# EAGLE board power (EAGLE 6.2)
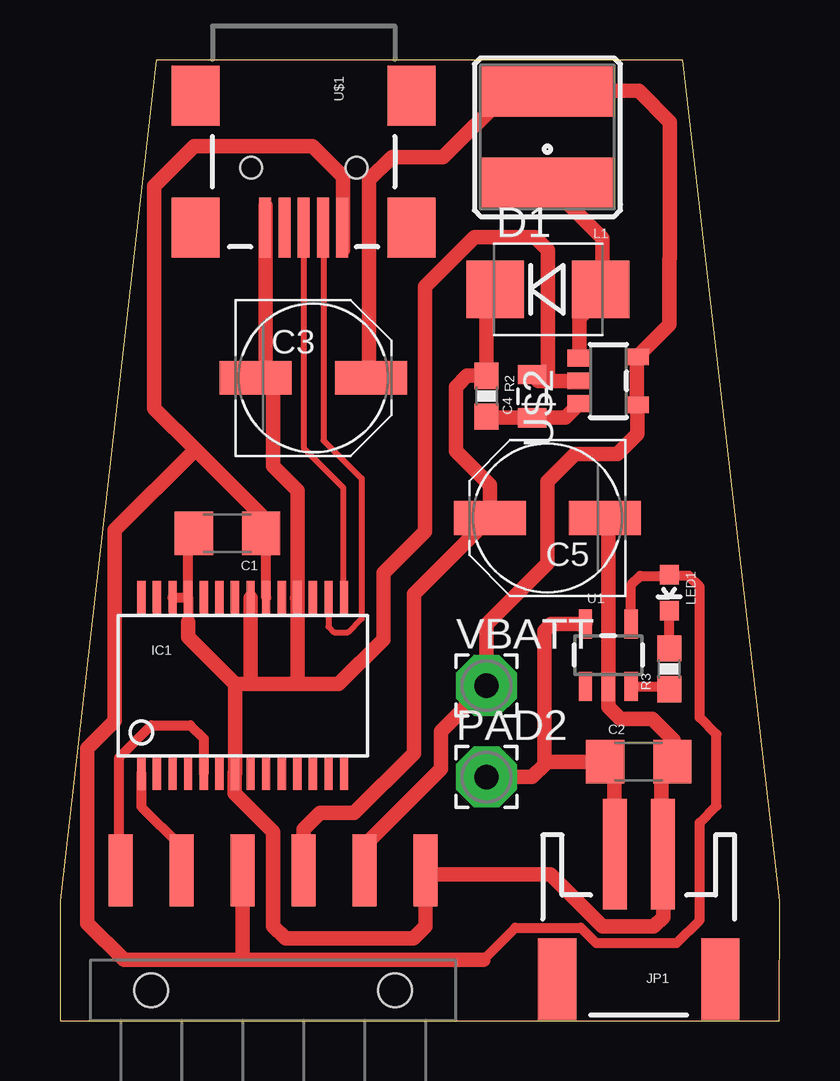
[diagram p0: board, top side]

Size 30 x 40.05 mm. Coordinates in mm from the lower left corner, seen from the top.
Outline: 0,0 29.99,0 29.99,0.09 30,5 25.96,40.05 4.01,40.05 0,5 0,0
Copper layers (1*16): Top 0.035mm / dielectric 1.5mm / Bottom 0.035mm
Design rules: minimum track width 10mil, minimum drill 24mil, track to track 8mil, track to pad 8mil, pad to pad 8mil, via to via 8mil, smd to smd 8mil, copper to edge 0mil, drill to drill 8mil, minimum pad ring 10mil, minimum via ring 8mil, stop-mask expansion 4mil, vias tented up to drill 0mil, thermal gap 10mil

## Footprints (pad centres in the part's own frame; a part is rotated, then mirrored left to right if it is on the bottom)
1206 = smd 1.6 x 1.8: 1 -1.4,0; 2 1.4,0
PANASONIC_D = smd 3 x 1.4: + 2.4,0; - -2.4,0
0805 = smd 0.8 x 1.2: 1 -0.9,0; 2 0.9,0
SMB-DIODE = smd 2.4 x 2.4: A 2.2,0; C -2.2,0
SSOP28DB = smd 0.348 x 1.397: 1 -4.225,-3.656; 2 -3.575,-3.656; 3 -2.925,-3.656; 4 -2.275,-3.656; 5 -1.625,-3.656; 6 -0.975,-3.656; 7 -0.325,-3.656; 8 0.325,-3.656; 9 0.975,-3.656; 10 1.625,-3.656; 11 2.275,-3.656; 12 2.925,-3.656; 13 3.575,-3.656; 14 4.225,-3.656; 15 4.225,3.656; 16 3.575,3.656; 17 2.925,3.656; 18 2.275,3.656; 19 1.625,3.656; 20 0.975,3.656; 21 0.325,3.656; 22 -0.325,3.656; 23 -0.975,3.656; 24 -1.625,3.656; 25 -2.275,3.656; 26 -2.925,3.656; 27 -3.575,3.656; 28 -4.225,3.656
JST-2-SMD = smd 1 x 4.6: 1 -1,-3.7; 2 1,-3.7 | smd 1.6 x 3.4: NC1 -3.4,1.5; NC2 3.4,1.5
1X06-SMD = smd 1 x 3: 1 -6.35,5; 2 -3.81,5; 3 -1.27,5; 4 1.27,5; 5 3.81,5; 6 6.35,5 | hole 1.4: -5.08,0; 5.08,0
CR54 = smd 5.5 x 2.15: P$1 0,1.92; P$2 0,-1.92
LED-0603 = smd 0.8 x 0.8: A 0,-0.75; C 0,0.75
2,54/1,0 = drill 1.016 pad 2.54 octagon: 1 0,0
0603-RES = smd 1.1 x 1: 1 -0.85,0; 2 0.85,0
SOT23-5 = smd 0.55 x 1.2: 1 -0.95,-1.3; 2 0,-1.3; 3 0.95,-1.3; 4 0.95,1.3; 5 -0.95,1.3
USB-MINIB = smd 2.5 x 0.5: D+ 2.5,0; D- 2.5,0.8; GND 2.5,-1.6; ID 2.5,-0.8; VBUS 2.5,1.6 | smd 2.5 x 2: MTN1 -3,4.5; MTN2 2.5,4.5; MTN3 -3,-4.5; MTN4 2.5,-4.5 | hole 0.9: 0,2.2; 0,-2.2
SOT23-5' = smd 0.7 x 1: 1 0.95,1.2; 2 0,1.2; 3 -0.95,1.2; 4 -1,-1.2; 5 1,-1.2

## Placement (x,y rotation side)
C1  4.7uF  [1206]  6.99,20.32 180 top
C2  4.7uF  [1206]  24.13,10.79 0 top
C3  100uF  [PANASONIC_D]  10.57,26.8 0 top
C4  1uF  [0805]  19.68,26.04 90 top
C5  100uF  [PANASONIC_D]  20.32,20.95 180 top
D1  ZHCS2000  [SMB-DIODE]  20.35,30.49 0 top
IC1  FT232RLSSOP  [SSOP28DB]  7.62,13.97 0 top
JP1  Battery  [JST-2-SMD]  24.13,3.24 180 top
JP3  [1X06-SMD]  8.89,1.27 0 top
L1  10uH  [CR54]  20.32,36.83 180 top
LED1  [LED-0603]  25.4,17.84 180 top
PAD2  [2,54/1,0]  17.78,10.16 0 top
R2  10  [0603-RES]  17.78,26.04 270 top
R3  150  [0603-RES]  25.4,14.67 90 top
U1  MAX1555  [SOT23-5]  22.86,15.24 0 top
U$1  USB-MINIB-5PIN  [USB-MINIB]  10.16,35.56 270 top
U$2  SP6641SP6641A/B  [SOT23-5']  22.86,26.67 90 top
VBATT  [2,54/1,0]  17.78,13.97 0 top

## Library data of the parts
C1 C2 C4 D1 IC1 JP1 L1 LED1 R2 R3 U1 U$1 = SparkFun
C3 C5 = rcl
JP3 = SparkFun-Connectors
PAD2 VBATT = wirepad
U$2 = Sipex Custom

## Nets
D+: IC1.15 U$1.D+
D-: IC1.16 U$1.D-
GND: C1.2 C2.2 C3.- C4.2 C5.- IC1.7 IC1.18 IC1.21 IC1.25 IC1.26 JP1.1 JP3.6 U1.2 U$1.GND U$2.2
LX: D1.A L1.P$1 U$2.1
N$2: LED1.C R3.2
N$4: R3.1 U1.3
N$55: C2.1 JP1.2 PAD2.1 U1.5
RX: IC1.5 JP3.1
TX: IC1.1 JP3.2
VBATT: C3.+ JP3.5 L1.P$2 U$2.4 U$2.5 VBATT.1
VBOOST: C5.+ D1.C JP3.4 R2.1
VBUS: C1.1 IC1.20 JP3.3 LED1.A U1.4 U$1.VBUS
VCCIO: IC1.4
VOUT: C4.1 R2.2 U$2.3

## Tracks (layer width: path | path; a pad name or v marks a point on that pad's centre or on a via)
D+
  Top 0.254: 11.87,17.66 IC1.15 11.81,17.66 11.81,22.23 10.16,23.88 U$1.D+
D-
  Top 0.254: IC1.16 11.2,16.43 11.43,16.19 12,16.19 12.57,16.76 12.57,22.61 10.99,24.19 10.99,33.03 U$1.D- 10.97,33.05
GND
  Top 0.254: 8.64,26.92 8.89,26.67 C3.- 9.14,26.67 | 24.89,5.33 24.89,6.86 JP1.1 25.15,7.11 25.4,7.37 | 15.24,6.1 JP3.6 | 8.57,33.97 8.45,32.79 U$1.GND
  Top 0.406: 25.15,7.05 25.4,7.3 25.4,7.37 25.4,8 25.08,8.32 | 24.89,5.33 25.08,5.33 25.15,5.27 | 15.41,6.1 JP3.6 | C5.- 22.81,21.04 22.81,21 22.86,20.85 | 7.94,17.62 IC1.21 | IC1.25 5.34,20.08 C1.2 | IC1.25 IC1.26 | IC1.25 5.34,16.62 | 25.08,10.35 C2.2 25.59,10.92 25.59,11.68
  Top 0.61: 25.08,8.32 25.08,10.35 | 25.59,11.68 24.7,12.57 23.37,12.57 22.86,13.08 U1.2 22.86,20.82 C5.- | 20.34,26.67 19.95,26.67 C4.2 | 8.57,33.97 8.57,27.13 C3.- | 8.89,26.67 8.89,23.11 9.91,22.1 9.91,17.64 | 9.91,17.64 IC1.18 | JP3.6 15.24,3.94 14.73,3.43 9.4,3.43 8.89,3.94 8.89,7.87 7.29,9.47 7.29,10.33 IC1.7 7.29,13.99 | 15.41,6.1 20.45,6.1 22.61,3.94 24.77,3.94 25.15,4.32 25.15,5.27 | 7.29,13.99 7.29,14.03 | U$2.2 20.34,26.67 | 20.34,26.67 20.34,32.13 19.81,32.66 17.27,32.66 15.21,30.61 15.21,20.4 13.49,18.67 13.49,15.9 11.62,14.03 9.91,14.03 | 7.35,13.95 7.29,13.99 | 7.29,14.03 7.87,14.03 | 7.87,14.03 9.91,14.03 | 7.29,14.03 7.29,14.04 5.33,16 5.33,16.61 5.34,16.62 | 9.91,17.64 9.91,14.03 | IC1.21 7.95,14.1 7.87,14.03
LX
  Top 0.61: U$2.1 21.66,29.28 22.61,30.23 22.61,31.09 | 22.61,31.09 D1.A | 22.61,31.09 22.61,32.62 L1.P$1
N$2
  Top 0.406: R3.2 LED1.C
N$4
  Top 0.406: U1.3 25.28,13.94 R3.1
N$55
  Top 0.254: 22.86,7.37 23.11,7.11 JP1.2
  Top 0.406: 22.86,7.37 22.86,8.26 23.11,8.51 | 23.11,10.41 C2.1
  Top 0.61: 23.11,8.51 23.11,10.41 | C2.1 20.19,10.79 | 20.19,10.79 20.19,10.67 19.68,10.16 PAD2.1 | U1.5 20.48,16.54 20.19,16.26 20.19,10.79
RX
  Top 0.254: 2.79,6.6 2.54,6.35 JP3.1
  Top 0.406: 2.79,6.6 2.79,6.99 2.48,7.3 2.48,10.99 3.81,12.32 5.44,12.32 5.99,11.76 5.99,10.34 IC1.5
TX
  Top 0.254: 5.08,6.35 JP3.2
  Top 0.406: IC1.1 3.4,8.92 5.02,7.3 5.02,6.33 JP3.2
VBATT
  Top 0.254: 13.97,26.67 C3.+
  Top 0.406: 12.89,26.72 C3.+ | U$2.4
  Top 0.61: 12.89,26.72 12.89,35.05 13.84,36.01 13.86,35.99 15.98,35.99 18.73,38.75 L1.P$2 24.13,38.76 25.43,37.47 25.43,31.77 25.4,31.75 25.4,29.01 U$2.5 U$2.4 | U$2.4 24.07,24.45 23.24,23.62 21.46,23.62 20.32,22.48 20.32,19.05 17.78,16.51 VBATT.1 15.88,12.06 15.88,10.49 12.7,7.32 JP3.5
VBOOST
  Top 0.254: 10.16,6.1 JP3.4 10.16,6.35
  Top 0.406: 17.78,30.84 D1.C
  Top 0.61: 17.78,21.09 C5.+ | 17.78,30.99 17.78,30.84 R2.1 16.98,26.89 16.51,26.42 16.51,23.75 17.92,22.34 C5.+ | 10.16,6.35 10.16,7.98 10.85,8.66 12.27,8.66 14.76,11.15 14.76,17.79 C5.+
VBUS
  Top 0.254: JP3.3 7.62,5.33 | 11.81,33.02 11.8,33.02 U$1.VBUS
  Top 0.406: 17.65,2.54 18.99,3.87 21.72,3.87 22.35,3.24 25.72,3.24 26.67,4.19 26.67,8.26 27.37,8.95 27.37,11.94 26.67,12.64 26.67,18.1 26.23,18.54 25.45,18.54 LED1.A 25.29,18.54 24.19,18.54 23.81,18.16 U1.4 | 11.81,33.02 11.81,32.13 | IC1.20 8.6,20.11 C1.1 8.38,21.08
  Top 0.61: 11.81,32.13 11.81,35.18 10.54,36.45 5.59,36.45 3.94,34.8 3.94,25.53 5.65,23.81 | 5.65,23.81 8.38,21.08 | 17.65,2.54 7.62,2.54 | JP3.3 7.62,2.54 | 7.62,2.54 2.67,2.54 1.14,4.06 1.14,11.35 2.29,12.5 2.29,20.45 5.65,23.81
VOUT
  Top 0.61: U$2.3 21.07,25.14 C4.1 17.83,25.14 R2.2